# Altium PCB RollingBall.PcbDoc
Units mil, origin at the board's own origin, x right, y up, seen from the top; angles counter-clockwise.
Board outline 3645.67 x 3645.67 mil, 2 copper layers (Top Layer, Bottom Layer); 91 components, 88 nets, 285 pads, 51 vias.
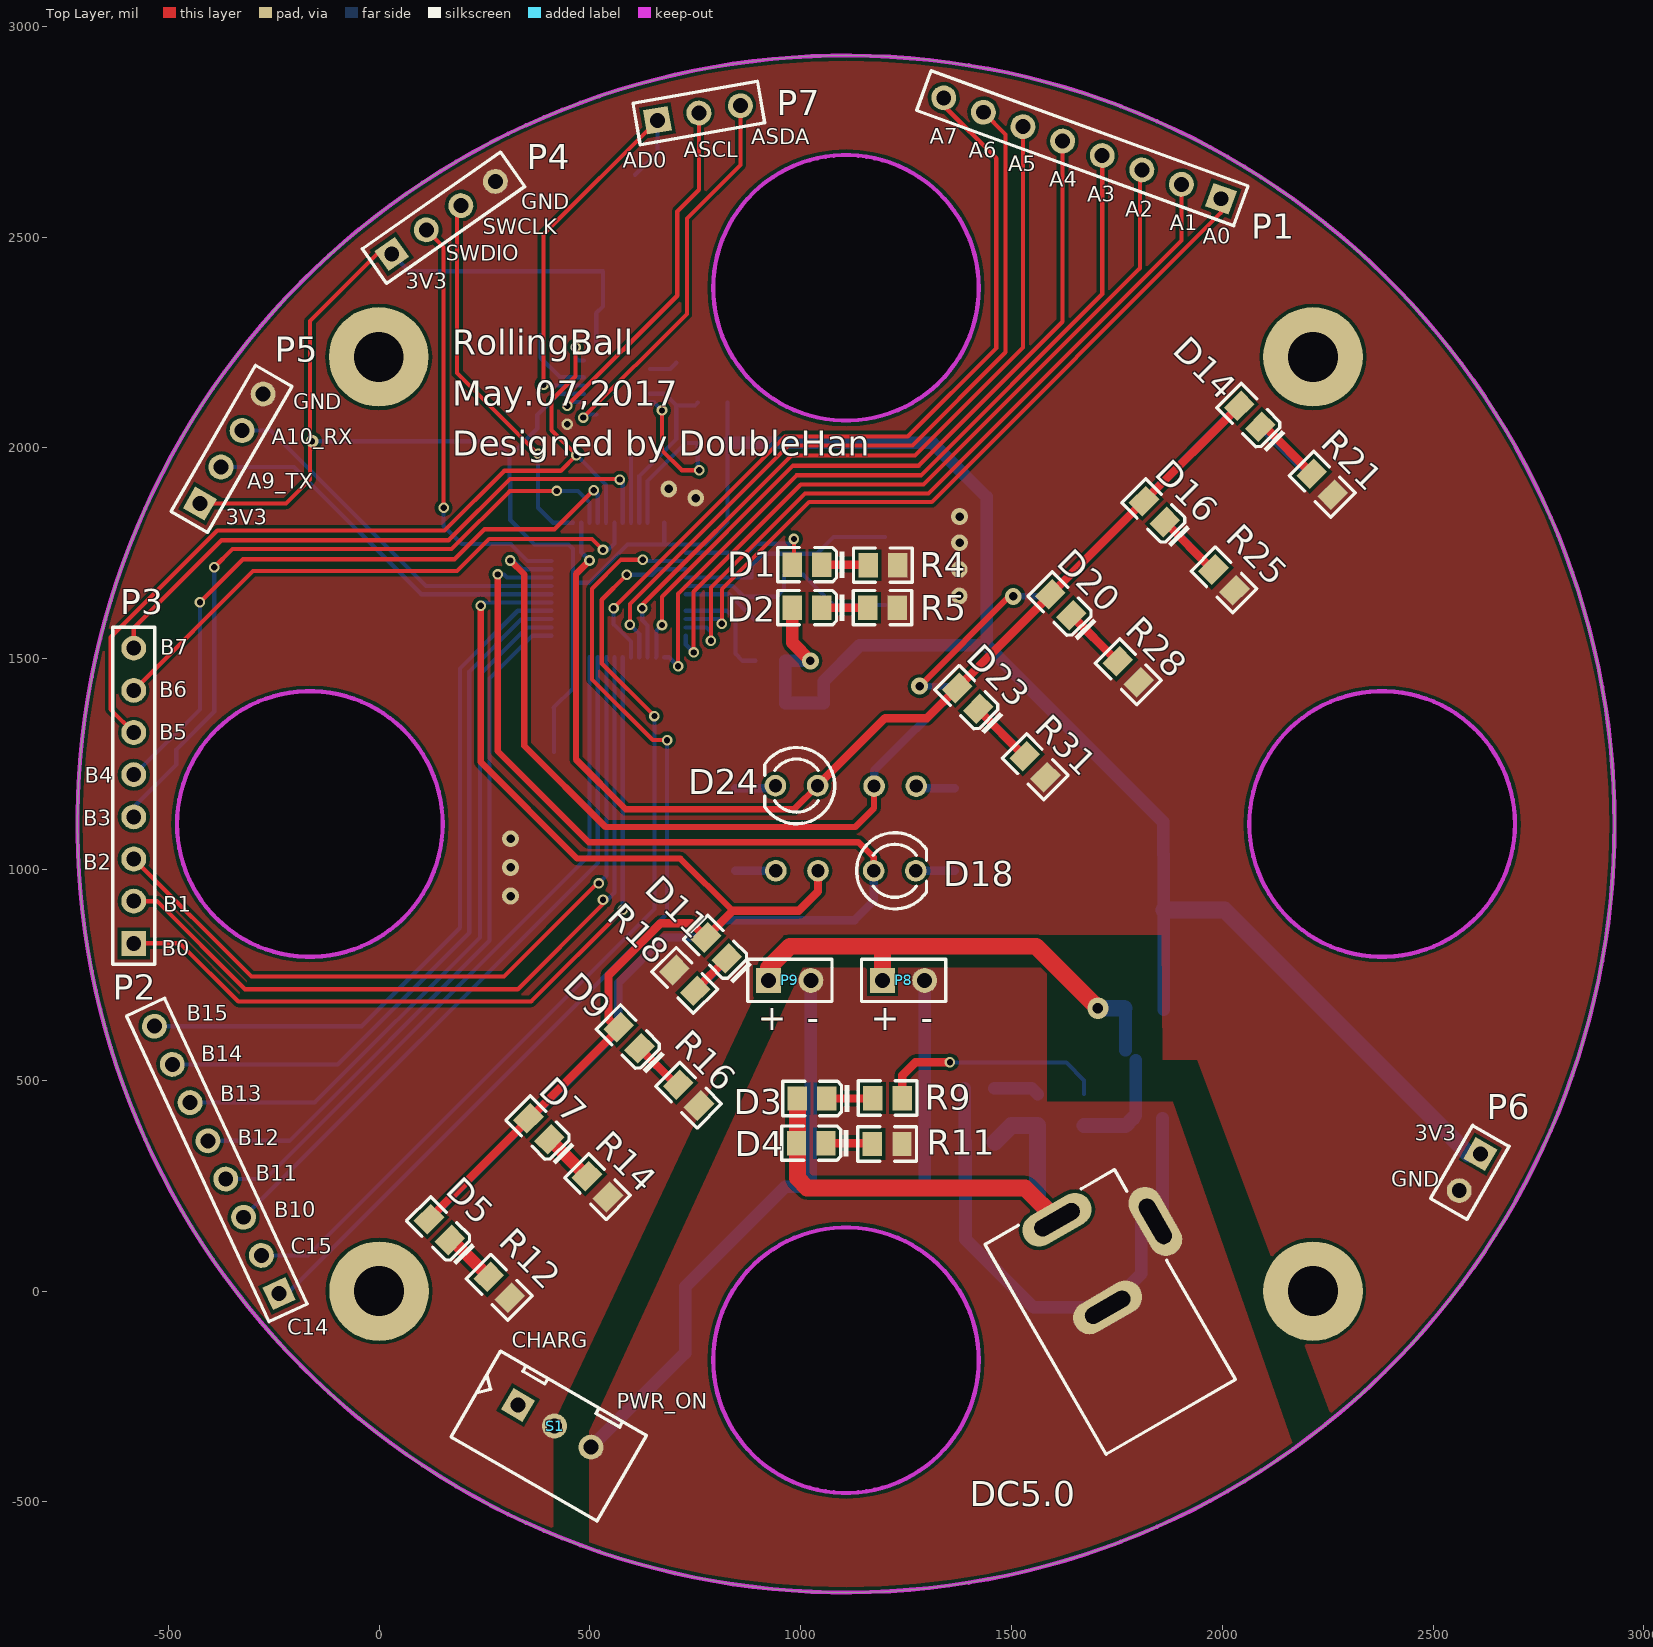
[diagram p0: Top Layer view]
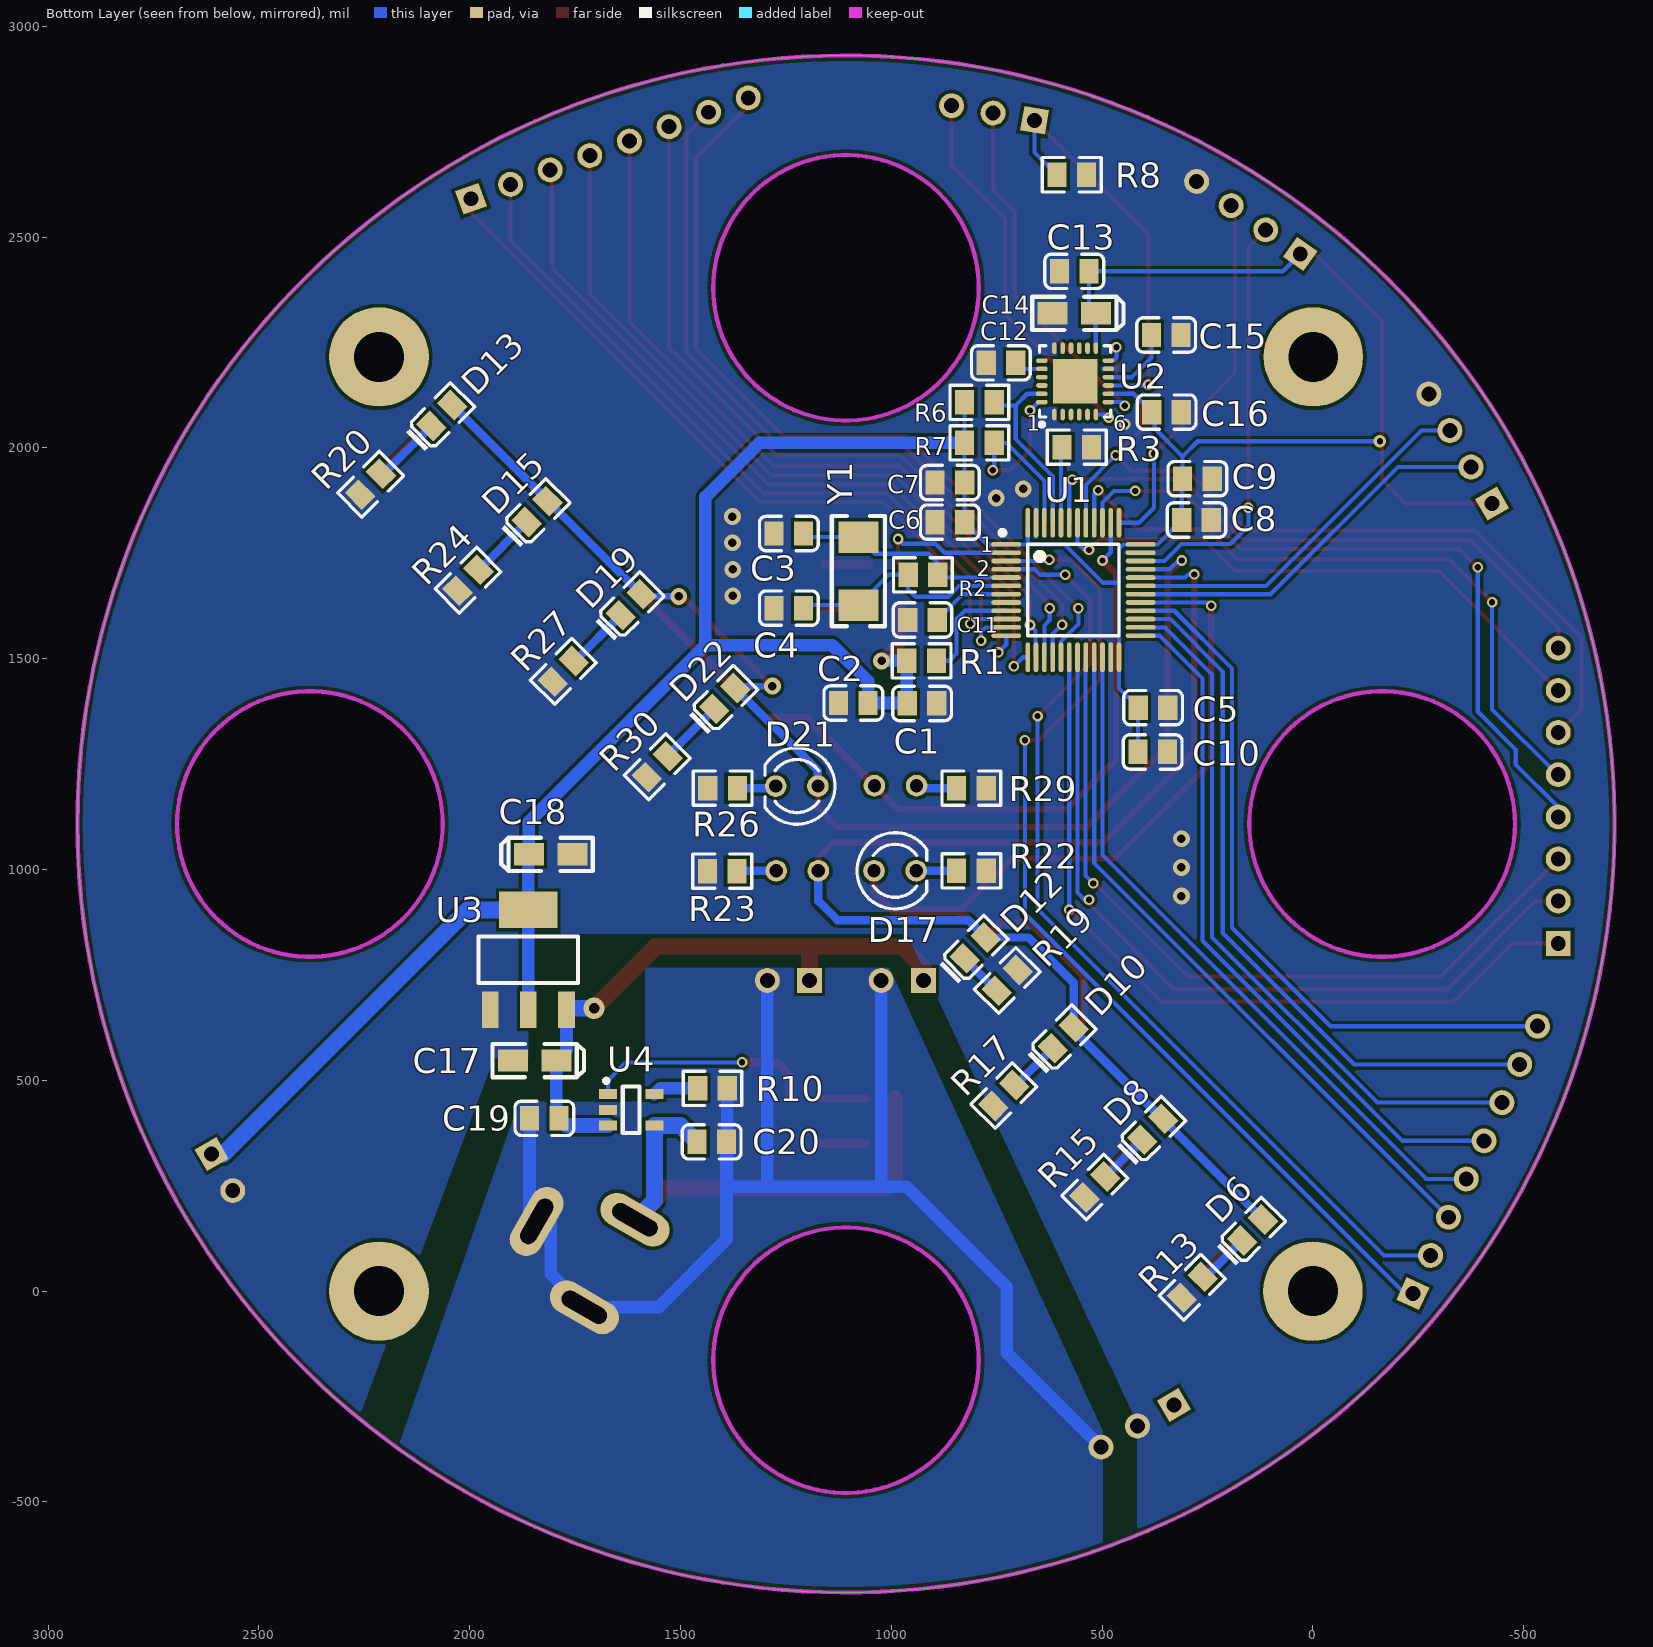
[diagram p1: Bottom Layer view, seen from below]
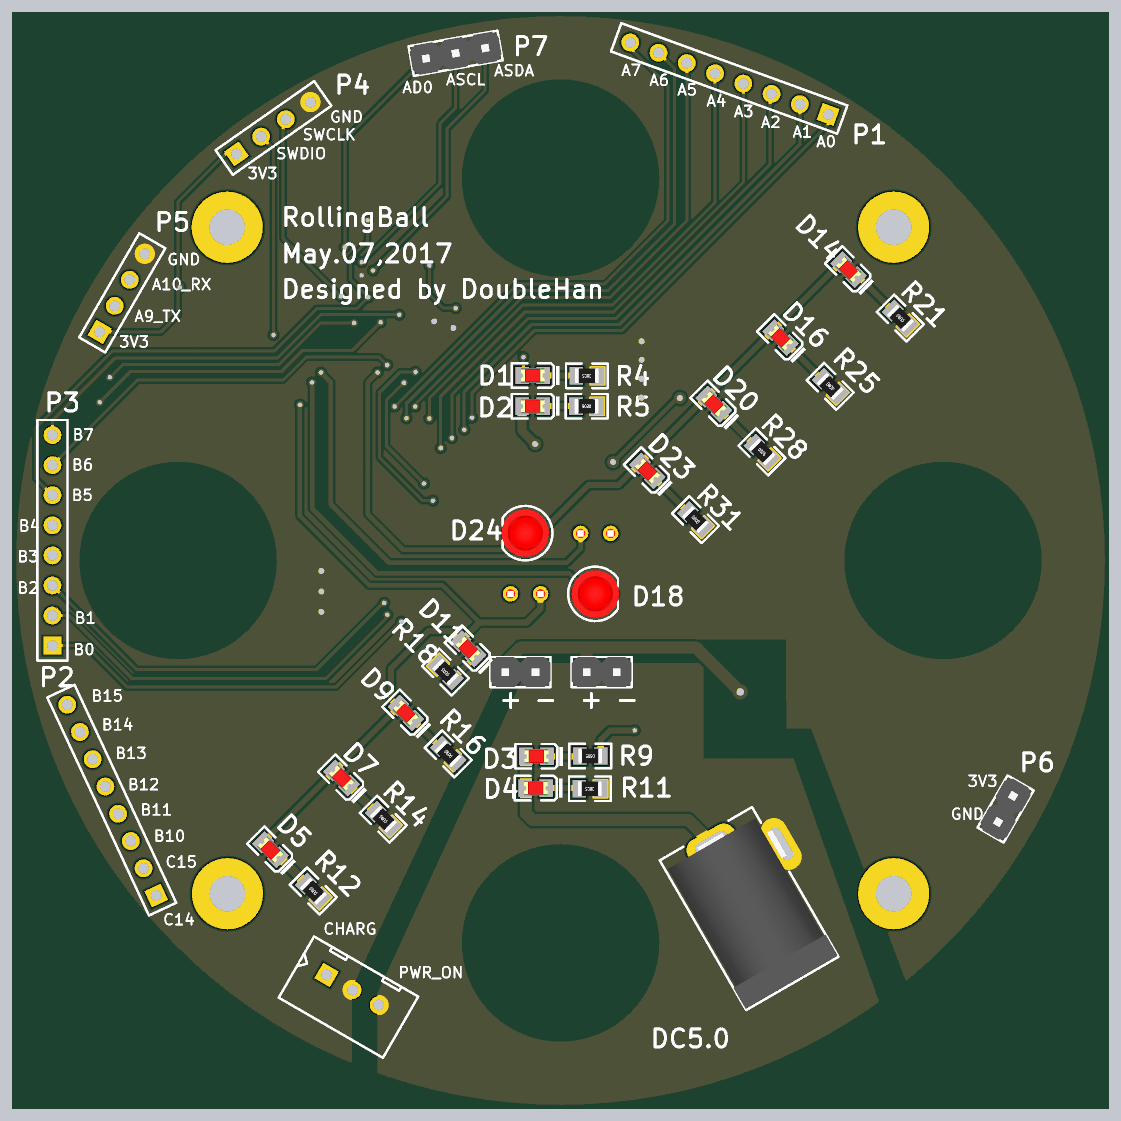
[diagram p2: 3D render of the assembled board from above, using the file's embedded part models]
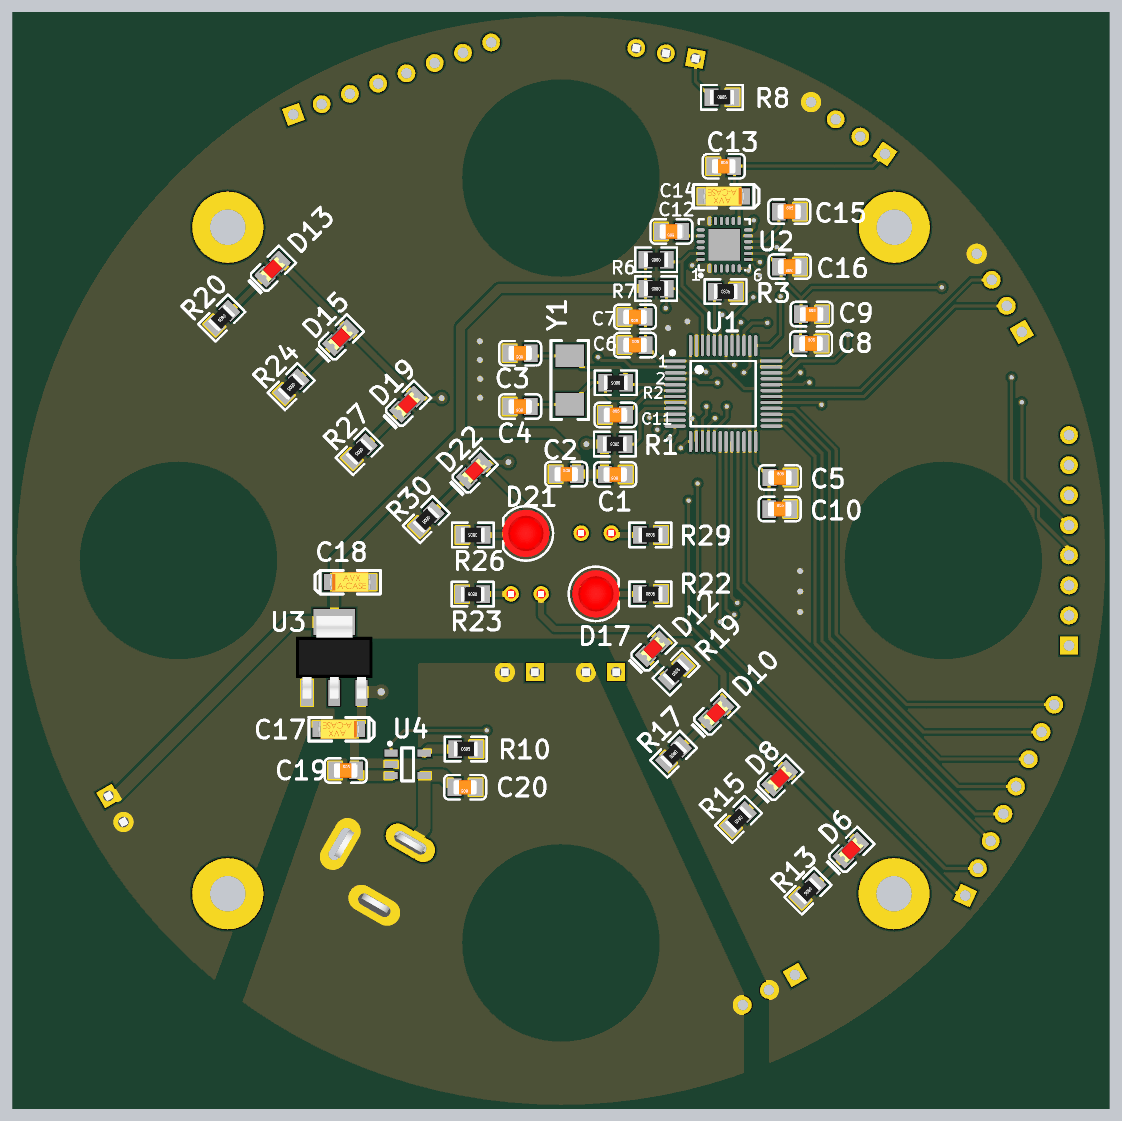
[diagram p3: 3D render of the assembled board from below, using the file's embedded part models]

## Layer stack, top to bottom
Top Solder: solder mask 0.4, Solder Resist, Dk 3.5
Top Layer: signal copper 1.4
Dielectric 1: dielectric 12.6, FR-4, Dk 4.8
Bottom Layer: signal copper 1.4
Bottom Solder: solder mask 0.4, Solder Resist, Dk 3.5

## Board outline
-715.44,1108.02 ccw(c1107.4,1108.02) 1107.4,-714.81 ccw(c1107.4,1108.02) 2930.23,1108.02 ccw(c1107.4,1108.02) 1107.4,2930.86 ccw(c1107.4,1108.02)
cut-out: -164.26,793.06 cw(c-164.26,1108.02) -479.22,1108.02 cw(c-164.26,1108.02) -164.26,1422.98 cw(c-164.26,1108.02) 150.7,1108.02 cw(c-164.26,1108.02)
cut-out: 1107.4,2064.72 cw(c1107.4,2379.68) 792.44,2379.68 cw(c1107.4,2379.68) 1107.4,2694.64 cw(c1107.4,2379.68) 1422.36,2379.68 cw(c1107.4,2379.68)
cut-out: 792.44,-163.63 ccw(c1107.4,-163.63) 1107.4,-478.59 ccw(c1107.4,-163.63) 1422.36,-163.63 ccw(c1107.4,-163.63) 1107.4,151.33 ccw(c1107.4,-163.63)
cut-out: 2064.09,1108.02 ccw(c2379.05,1108.02) 2379.05,793.06 ccw(c2379.05,1108.02) 2694.01,1108.02 ccw(c2379.05,1108.02) 2379.05,1422.98 ccw(c2379.05,1108.02)

## Design rules (kind name [scope] priority, off if disabled: settings)
Clearance [All] p1: gap=8
HoleSize [All] p1: absolutevalues=TRUE maxlimit=200 minlimit=1 maxpercent=80.000 minpercent=20.000
PolygonConnect [All] p1: connectstyle=Direct reliefconductorwidth=10 reliefentries=4 polygonreliefangle="90 Angle" airgapwidth=10
RoutingVias [All] p1: holewidth=11.81 width=19.68 viastyle="Through Hole" minholewidth=11.81 minwidth=19.68 maxholewidth=28 maxwidth=50
SolderMaskExpansion [All] p1: expansion=4
Width [All] p1: maxlimit=100 minlimit=6 preferedwidth=10 minimp=50.000000 maximp=50.000000 favimp=50.000000
29 further rules are at their usual default settings.

## Classes and differential pairs
component class LED: D5 D6 D7 D8 D9 D10 D11 D12 D13 D14 D15 D16 D17 D18 D19 D20 D21 D22 D23 D24 R12 R13 R14 R15 R16 R17 R18 R19 R20 R21 R22 R23 R24 R25 R26 R27 R28 R29 R30 R31
component class power: C17 C18 C19 C20 D3 D4 DC5.0 P8 P9 R9 R10 R11 S1 U3 U4
component class maincont: C1 C2 C3 C4 C5 C6 C7 C8 C9 C10 C11 D1 D2 P1 P2 P3 P4 P5 R1 R2 R3 R4 R5 U1 Y1
component class imu: C12 C13 C14 C15 C16 P6 P7 R6 R7 R8 U2

## Components (designator, comment, footprint, x,y, rotation, side; value= is the part's Value field where it differs from the comment)
C1 "10nF (103) 10% 50V" LC-0805_C 927,1394 r0 bottom
C2 "1uF (105) 10% 50V" LC-0805_C 1090,1395 r180 bottom
C3 "20pF (200) 5% 50V" LC-0805_C 1243,1797 r0 bottom
C4 "20pF (200) 5% 50V" LC-0805_C 1243,1620 r0 bottom
C5 "100nF(104) 10% 50V" LC-0805_C 379,1384 r180 bottom
C6 "4.7uF (475) 10% 25V" LC-0805_C 861,1824 r180 bottom
C7 "100nF(104) 10% 50V" LC-0805_C 861,1918 r0 bottom
C8 "100nF(104) 10% 50V" LC-0805_C 276,1829 r180 bottom
C9 "100nF(104) 10% 50V" LC-0805_C 274,1927 r180 bottom
C10 "100nF(104) 10% 50V" LC-0805_C 380,1279 r180 bottom
C11 "100nF(104) 10% 50V" LC-0805_C 926,1592 r180 bottom
C12 "2.2nF (222) 5% 50V" LC-0805_C 740,2202 r0 bottom
C13 "100nF(104) 10% 50V" LC-0805_C 566,2419 r180 bottom
C14 "10uF (106) ±10% 16V" LC-CASE-A_3216 566,2319 r180 bottom
C15 "100nF(104) 10% 50V" LC-0805_C 348,2268 r180 bottom
C16 "10nF (103) 10% 50V" LC-0805_C 347,2085 r0 bottom
C17 "10uF (106) ±10% 16V" LC-CASE-A_3216 1846,547 r180 bottom
C18 "10uF (106) ±10% 16V" LC-CASE-A_3216 1808,1036 r0 bottom
C19 "10uF (106) 10% 25V" LC-0805_C 1823,410 r180 bottom
C20 "1uF (105) 10% 50V" LC-0805_C 1426,354 r0 bottom
D1 "翠绿 0805" LC-0805_LED_S1 1015,1723 r180 top
D2 "红灯 0805" LC-0805_LED_S1 1015,1621 r180 top
D3 "翠绿 0805" LC-0805_LED_S1 1027,457 r180 top
D4 "红灯 0805" LC-0805_LED_S1 1025,351 r180 top
D5 "翠绿 0805" LC-0805_LED_S1 143,146 r135 top
D6 "翠绿 0805" LC-0805_LED_S1 143,145 r135 bottom
D7 "翠绿 0805" LC-0805_LED_S1 379,385 r135 top
D8 "翠绿 0805" LC-0805_LED_S1 380,384 r135 bottom
D9 "翠绿 0805" LC-0805_LED_S1 593,601 r135 top
D10 "翠绿 0805" LC-0805_LED_S1 592,601 r135 bottom
D11 "翠绿 0805" LC-0805_LED_S1 800,814 r135 top
D12 "翠绿 0805" LC-0805_LED_S1 801,814 r135 bottom
D13 "翠绿 0805" LC-0805_LED_S1 2066,2077 r135 bottom
D14 "翠绿 0805" LC-0805_LED_S1 2065,2075 r135 top
D15 "翠绿 0805" LC-0805_LED_S1 1840,1849 r135 bottom
D16 "翠绿 0805" LC-0805_LED_S1 1839,1849 r135 top
D17 "LED0" LED_A2 991,997 r0 bottom
D18 "LED0" LED_A2 1223,997 r180 top
D19 "翠绿 0805" LC-0805_LED_S1 1617,1628 r135 bottom
D20 "翠绿 0805" LC-0805_LED_S1 1617,1628 r135 top
D21 "LED0" LED_A2 1224,1198 r180 bottom
D22 "翠绿 0805" LC-0805_LED_S1 1395,1406 r135 bottom
D23 "翠绿 0805" LC-0805_LED_S1 1396,1406 r135 top
D24 "LED0" LED_A2 990,1199 r0 top
DC5.0 "PWRCON" DC-005 1588,204 r120 top (schematic designator J1)
P1 "PA_L" HDR1X8 1997,2591 r160 top
P2 "PB_H" HDR1X8 -237,-6 r115 top
P3 "PB_L" HDR1X8 -582,825 r90 top
P4 "SWD" HDR4X1-2.54 30,2460 r35 top
P5 "UART" HDR4X1-2.54 -425,1868 r60 top
P6 "PWR" HDR2X1-2.54 2612,325 r240 top
P7 "AUX" HDR3X1-2.54 660,2777 r10 top
P8 "BAT1" HDR2X1-2.54 1194,737 r0 top
P9 "BAT2" HDR2X1-2.54 924,737 r0 top
R1 "0Ω (0R0) ±1%" LC-0805_R 928,1495 r0 bottom
R2 "NC" LC-0805_R 925,1699 r0 bottom
R3 "1KΩ (1001) ±1%" LC-0805_R 560,2002 r180 bottom
R4 "1KΩ (1001) ±1%" LC-0805_R 1195,1722 r180 top
R5 "1KΩ (1001) ±1%" LC-0805_R 1194,1621 r180 top
R6 "4.7KΩ (4701) ±1%" LC-0805_R 791,2108 r0 bottom
R7 "4.7KΩ (4701) ±1%" LC-0805_R 791,2012 r0 bottom
R8 "1KΩ (1001) ±1%" LC-0805_R 572,2648 r180 bottom
R9 "1KΩ (1001) ±1%" LC-0805_R 1206,458 r180 top
R10 "1.5KΩ (1501) ±1%" LC-0805_R 1424,481 r180 bottom
R11 "1KΩ (1001) ±1%" LC-0805_R 1205,349 r180 top
R12 "200Ω (2000) ±1%" LC-0805_R 285,9 r315 top
R13 "200Ω (2000) ±1%" LC-0805_R 286,9 r315 bottom
R14 "200Ω (2000) ±1%" LC-0805_R 518,248 r315 top
R15 "200Ω (2000) ±1%" LC-0805_R 517,247 r315 bottom
R16 "200Ω (2000) ±1%" LC-0805_R 734,465 r315 top
R17 "200Ω (2000) ±1%" LC-0805_R 733,464 r315 bottom
R18 "200Ω (2000) ±1%" LC-0805_R 725,737 r135 top
R19 "200Ω (2000) ±1%" LC-0805_R 725,737 r135 bottom
R20 "200Ω (2000) ±1%" LC-0805_R 2235,1914 r315 bottom
R21 "200Ω (2000) ±1%" LC-0805_R 2237,1914 r315 top
R22 "200Ω (2000) ±1%" LC-0805_R 810,997 r180 bottom
R23 "200Ω (2000) ±1%" LC-0805_R 1401,996 r0 bottom
R24 "200Ω (2000) ±1%" LC-0805_R 2004,1686 r315 bottom
R25 "200Ω (2000) ±1%" LC-0805_R 2004,1687 r315 top
R26 "200Ω (2000) ±1%" LC-0805_R 1400,1193 r0 bottom
R27 "200Ω (2000) ±1%" LC-0805_R 1778,1470 r315 bottom
R28 "200Ω (2000) ±1%" LC-0805_R 1777,1469 r315 top
R29 "200Ω (2000) ±1%" LC-0805_R 810,1193 r180 bottom
R30 "200Ω (2000) ±1%" LC-0805_R 1555,1244 r315 bottom
R31 "200Ω (2000) ±1%" LC-0805_R 1556,1244 r315 top
S1 "SS-12D00(1P2T)" XH2.54-3P 416,-320 r330 top
U1 "STM32F103C8T6" LC-LQFP-48_7x7x05P 568,1663 r270 bottom
U2 "MPU-6050" LC-QFN-24_4x4x05P 564,2158 r180 bottom
U3 "AMS1117-3.3" LC-SOT-223 1861,786 r270 bottom
U4 "TP4054" LC-SOT-23-5 1617,430 r0 bottom
Y1 "8MHz ±20ppm 20pF" LC-SMD-5032_2P 1078,1708 r270 bottom

## Footprints (in the part's own frame and the unit in brackets; to place one, negate y for a bottom-side part, rotate by r counter-clockwise, add the part's x,y. Pads: shape width x height; smd on the part's side, far side on the other; paste and mask are expansions set on the pad)
DC-005 [mm] "DC电源插座"
  oval 2x4.5 hole 1 slot 3 at 90 deg: 1(-1.016,0) 2(-7.112,0)
  oval 4.5x2 hole 1 slot 3 at 0 deg: 3(-4.064,-5.08)
  silkscreen extent -14.73,-4.5 -0.13,4.5, body extent -14.59,-5.01 -0.76,4.5, height 11.02
HDR1X8 [mm] "Connector; Header; 8 Position"
  rect 1.5x1.5 hole 0.9: 1(0,0)
  round 1.5 hole 0.9: 2(2.54,0) 3(5.08,0) 4(7.62,0) 5(10.16,0) 6(12.7,0) 7(15.24,0) 8(17.78,0)
  silkscreen extent -1.27,-1.27 19.05,1.27
HDR2X1-2.54 [mm] "2.54单排针排座"
  rect 1.5x1.5 hole 0.9: 1(0,0)
  round 1.5 hole 0.9: 2(2.54,0)
  silkscreen extent -1.27,-1.27 3.81,1.27, body extent -1.27,-1.27 3.81,1.27, height 8.54
HDR3X1-2.54 [mm] "2.54单排针排座"
  rect 1.5x1.5 hole 0.9: 1(0,0)
  round 1.5 hole 0.9: 2(2.54,0) 3(5.08,0)
  silkscreen extent -1.27,-1.27 6.35,1.27, body extent -1.27,-1.27 6.35,1.27, height 8.54
HDR4X1-2.54 [mm] "2.54单排针排座"
  rect 1.5x1.5 hole 0.9: 1(0,0)
  round 1.5 hole 0.9: 2(2.54,0) 3(5.08,0) 4(7.62,0)
  silkscreen extent -1.27,-1.27 8.89,1.27
LC-0805_C [mm]
  rect 1.16x1.47 smd: 1(-0.89,0) 2(0.89,0)
  silkscreen extent -1.77,-1.04 1.77,1.04, body extent -1,-0.63 1,0.62, height 0.77
LC-0805_LED_S1 [mm]
  rect 1.16x1.47 smd: A(0.89,0) K(-0.89,0)
  silkscreen extent -2.25,-1.04 1.77,1.03, body extent -1.01,-0.62 1.01,0.62, height 1.1
LC-0805_R [mm]
  rect 1.16x1.47 smd: 1(-0.89,0) 2(0.89,0)
  silkscreen extent -1.77,-1.04 1.77,1.03, body extent -1,-0.63 1,0.62, height 0.49
LC-CASE-A_3216 [mm]
  rect 1.8x1.35 smd: 1(1.31,0) 2(-1.31,0)
  silkscreen extent -2.54,-1 2.97,1, body extent -1.7,-0.84 1.7,0.84, height 1.71
LC-LQFP-48_7x7x05P [mm]
  oval 0.28x1.8 smd mask+0.051: 1(-2.75,-4.05) 2(-2.25,-4.05) 3(-1.75,-4.05) 4(-1.25,-4.05) 5(-0.75,-4.05) 6(-0.25,-4.05) 7(0.25,-4.05) 8(0.75,-4.05) 9(1.25,-4.05) 10(1.75,-4.05) 11(2.25,-4.05) 12(2.75,-4.05) 25(2.75,4.05) 26(2.25,4.05) 27(1.75,4.05) 28(1.25,4.05) 29(0.75,4.05) 30(0.25,4.05) 31(-0.25,4.05) 32(-0.75,4.05) 33(-1.25,4.05) 34(-1.75,4.05) 35(-2.25,4.05) 36(-2.75,4.05)
  oval 1.8x0.28 smd mask+0.051: 13(4.05,-2.75) 14(4.05,-2.25) 15(4.05,-1.75) 16(4.05,-1.25) 17(4.05,-0.75) 18(4.05,-0.25) 19(4.05,0.25) 20(4.05,0.75) 21(4.05,1.25) 22(4.05,1.75) 23(4.05,2.25) 24(4.05,2.75) 37(-4.05,2.75) 38(-4.05,2.25) 39(-4.05,1.75) 40(-4.05,1.25) 41(-4.05,0.75) 42(-4.05,0.25) 43(-4.05,-0.25) 44(-4.05,-0.75) 45(-4.05,-1.25) 46(-4.05,-1.75) 47(-4.05,-2.25) 48(-4.05,-2.75)
  silkscreen extent -3.6,-4.43 2.75,2.75
LC-QFN-24_4x4x05P [mm]
  rect 2.68x2.68 smd mask+0.051: 0(0,0)
  oval 0.28x0.7 smd mask+0.051: 1(-1.25,-2) 2(-0.75,-2) 3(-0.25,-2) 4(0.25,-2) 5(0.75,-2) 6(1.25,-2) 13(1.25,2) 14(0.75,2) 15(0.25,2) 16(-0.25,2) 17(-0.75,2) 18(-1.25,2)
  oval 0.7x0.28 smd mask+0.051: 7(2,-1.25) 8(2,-0.75) 9(2,-0.25) 10(2,0.25) 11(2,0.75) 12(2,1.25) 19(-2,1.25) 20(-2,0.75) 21(-2,0.25) 22(-2,-0.25) 23(-2,-0.75) 24(-2,-1.25)
  silkscreen extent -2.15,-2.72 2.15,2.15
LC-SMD-5032_2P [mm]
  rect 1.9x2.4 smd: 1(-2.05,0) 2(2.05,0)
  silkscreen extent -3.32,-1.6 3.32,1.6
LC-SOT-23-5 [mm]
  rect 1.1x0.6 smd: 1(1.4,-0.95) 2(1.4,0) 3(1.4,0.95) 4(-1.4,0.95) 5(-1.4,-0.95)
  silkscreen extent -0.5,-1.87 1.63,1.4
LC-SOT-223 [mm]
  rect 2.2x1 smd: 1(3,-2.3) 2(3,0) 3(3,2.3)
  rect 2.2x3.5 smd: 2(-3,0)
  silkscreen extent -1.4,-3 1.4,3, body extent -3.49,-3.24 3.49,3.24, height 1.64
LED_A2 [mm] "直径3MM LED"
  round 1.3 hole 0.8: 1(1.27,0) 2(-1.27,0)
  silkscreen extent -1.91,-2.3 2.3,2.3, body extent -2,-2 2,2, height 4.5
XH2.54-3P [mm] "XH2.54端子直针"
  rect 1.5x1.5 hole 0.9: 1(-2.54,0)
  round 1.5 hole 0.9: 2(0,0) 3(2.54,0)
  silkscreen extent -5.08,-3.68 5.08,2.29, body extent -5.08,-3.68 5.08,2.29, height 1.5

## Part data
C1 C16: library part "0805 10nF (103) 10% 50V", "贴片电容"
C2 C20: library part "0805 1uF (105) 10% 50V", "贴片电容"
C3 C4: library part "0805 20pF (200) 5% 50V", "贴片电容"
C5 C7 C8 C9 C10 C11 C13 C15: library part "0805 100nF(104) 10% 50V", "贴片电容"
C6: library part "0805 4.7uF (475) 10% 25V", "贴片电容"
C12: library part "0805 2.2nF (222) 5% 50V", "贴片电容"
C14 C17 C18: library part "3216 10uF (106) 10% 16V", "钽电容"
C19: library part "0805 10uF (106) 10% 25V", "贴片电容"
D1 D3 D5 D6 D7 D8 D9 D10 D11 D12 D13 D14 D15 D16 D19 D20 D22 D23: library part "0805 翠绿", "发光二极管"
D2 D4: library part "0805 红灯", "发光二极管"
D17 D18 D21 D24: "发光二极管"
DC5.0: "直流电源端子"
P1 P2 P3: library part "Header 8", "Header, 8-Pin"
P4 P5: library part "Header 4", "接插件"
P6 P8 P9: library part "Header 2", "接插件"
P7: library part "Header 3", "接插件"
R1: library part "0805 0Ω (0R0) 1%", "贴片电阻"
R2: library part "0805 1MΩ (1004) 1%", "贴片电阻"
R3 R4 R5 R8 R9 R11: library part "0805 1KΩ (1001) 1%", "贴片电阻"
R6 R7: library part "0805 4.7KΩ (4701) 1%", "贴片电阻"
R10: library part "0805 1.5KΩ (1501) 1%", "贴片电阻"
R12 R13 R14 R15 R16 R17 R18 R19 R20 R21 R22 R23 R24 R25 R26 R27 R28 R29 R30 R31: library part "0805 200Ω (2000) 1%", "贴片电阻"
S1: library part SW-SPDT, "开关"
U1: "ARM"
U2: "传感器"
U3: library part "SOT-223 AMS1117-3.3", "低压差线性稳压(LDO)"
U4: "电池电源管理"
Y1: library part "SMD-5032_2P 8MHz 20ppm 20pF", "贴片晶振"

## Free pads (board coordinates)
  round 236.22 hole 118.11: 0(2215,2216) 1(-1,2216) 2(0,0) 3(2215,0)

## Via types
v1: diameter 25, hole 15, Top Layer to Bottom Layer, tented both sides, 36 vias
v2: diameter 40, hole 20, Top Layer to Bottom Layer, tented both sides, 12 vias
v3: diameter 27, hole 15, Top Layer to Bottom Layer, tented both sides, 1 vias
v4: diameter 50, hole 25, Top Layer to Bottom Layer, tented both sides, 1 vias
v5: diameter 30, hole 15, Top Layer to Bottom Layer, tented both sides, 1 vias

## Nets (pads, with @x,y where several pads share a name; then routed paths per layer and width w, separated by ;. In a path a pad name is that pad's centre, name@x,y a point inside that pad or via, vN(x,y) a via of type N, cw(c..) or ccw(c..) an arc to the next point about the centre after c; other vN are vias at no path point)
AD0: P7.1 R8.1 U2.9 | length 985.8
  Top Layer w10: v1(390,2150) 390,2507 P7.1
  Bottom Layer w10: v1(390,2150) 391.84,2148.16 U2.9 ; R8.1 660,2700.96 P7.1
ASCL: P7.2 U2.7 | length 866.7
  Top Layer w10: v1(446,2100) 707,2361 707,2561 758.48,2612.48 P7.2
  Bottom Layer w10: v1(446,2100) 454.79,2108.79 U2.7
ASDA: P7.3 U2.6 | length 928
  Top Layer w10: v1(484,2072) 730,2318 730,2544 856.96,2670.96 P7.3
  Bottom Layer w10: v1(484,2072) 491.26,2079.26 U2.6
GND: C1.1 C2.1 C3.2 C4.2 C5.2 C6.1 C7.2 C8.2 C9.2 C10.2 C11.1 C12.2 C13.1 C14.2 C15.2 C16.1 C17.2 C18.2 P4.4 P5.4 P6.2 R3.2 R4.1 R5.1 R8.2 R12.2 R13.2 R14.2 R15.2 R16.2 R17.2 R18.2 R19.2 R20.2 R21.2 R22.2 R23.2 R24.2 R25.2 R26.2 R27.2 R28.2 R29.2 R30.2 R31.2 S1.2 U1.8 U1.23 U1.35 U1.47 U2.1 U2.11 U2.18 U3.1
  other v2: 312,937 312,1005 312,1073 1376,1649 1376,1712 1377,1775 1377,1837 751,1881 687,1903
  other v3: 446,2056
GND_BAT: C19.1 C20.1 DC5.0.2 DC5.0.3 P8.2 P9.2 R10.2 R11.1 S1.3 U4.2 | length 3533.6
  Bottom Layer w30: S1.3 725.8,-146.8 725.8,9.8 964,248 1388.96,248 R10.2 ; 1024,251 P9.2 ; 1294,256 P8.2 ; C20.1 1390.96,123.04 1552.49,-38.49 DC5.0.2 1807.56,41.08 DC5.0.3@1807.56,165.44 ; DC5.0.3@1858.04,182.27 C19.1
INT: P3.6 U1.41 U2.12 | length 2073.6
  Top Layer w10: P3.6 -637,1380 -637,1550.52 -635.91,1551.61 -635.91,1552.09 -384,1804 155,1804 297,1946 431,1946 v1(468,1983) 409,2042 409,2113 466,2170 v1(466,2239)
  Bottom Layer w10: v1(466,2239) 466,2214 472.79,2207.21 U2.12 ; v1(468,1983) 538.47,1912.53 U1.41
LED_CONT1: D5.A D7.A D9.A D11.A D17.1 U1.29 | length 2716.7
  Top Layer w15: v1(241,1626) 241,1255 470,1026 714.45,1026 838.45,902
  Top Layer w20: D5.A 568.22,620.78 544,645 544,749 668,873 741,873 D11.A 838.45,902 995,902 1041,948 D17.1
  Bottom Layer w10: v1(241,1626) 248.47,1633.47 U1.29
LED_CONT2: D6.A D8.A D10.A D12.A D18.1 U1.32 | length 3083.5
  Top Layer w15: v1(281,1700) 281,1281 497,1065 1137,1065 1173,1029 D18.1
  Bottom Layer w10: v1(281,1700) 296,1700 303.47,1692.53 U1.32
  Bottom Layer w20: D6.A 567.22,618.78 D10.A 567.22,731.22 674.78,838.78 D12.A 817.45,880 1128,880 1173,925 D18.1
LED_CONT3: D13.A D15.A D19.A D21.1 D22.A U1.33 | length 2977.2
  Top Layer w15: v1@307,1733 v1(311,1733) 344,1700 344,1294 537,1101 1129,1101 1174,1146 D21.1 ; v2(1282,1435) v2@1495,1648
  Bottom Layer w10: v1(311,1733) 315,1737 339.79,1712.21 U1.33
  Bottom Layer w15: v2(1282,1435) 1366,1435 D22.A ; v2(1504,1648) 1587.45,1648 D19.A
  Bottom Layer w20: D21.1 1174,1234.55 D22.A ; D19.A D13.A
LED_CONT4: D14.A D16.A D20.A D23.A D24.1 U1.38 | length 2601.2
  Top Layer w15: v1(499,1733) 467,1701 467,1261 585,1143 984,1143 D24.1
  Top Layer w20: D24.1 1200,1359 1299.45,1359 D23.A D16.A D14.A
  Bottom Layer w10: U1.38 479.42,1752.58 v1(499,1733)
NetC3_1: C3.1 R2.1 U1.5 Y1.1 | length 528.4
  Bottom Layer w10: U1.5 883.49,1692.53 883.49,1720.49 912,1749 1038.29,1749 Y1.1 C3.1@1199.67,1788.71
NetC4_1: C4.1 R2.2 U1.6 Y1.2 | length 555.1
  Bottom Layer w10: U1.6 839.16,1672.84 865,1647 942,1647 960.04,1665.04 R2.2 1006.29,1699 Y1.2 C4.1@1200.67,1627.29
NetC11_2: C11.2 U1.7 | length 188.8
  Bottom Layer w10: U1.7 829.8,1653.16 C11.2
NetC12_1: C12.1 U2.20 | length 68.2
  Bottom Layer w10: U2.20 690.49,2187.53 C12.1
NetC15_1: C15.1 U2.10 | length 175.4
  Bottom Layer w10: C15.1 383.04,2213.96 429.16,2167.84 U2.10
NetD1_K: D1.K R4.2 | length 108.9
  Top Layer w20: D1.K R4.2@1158.96,1723
NetD2_K: D2.K R5.2 | length 108.9
  Top Layer w20: D2.K R5.2
NetD3_K: D3.K R9.2 | length 107.9
  Top Layer w20: D3.K R9.2@1169.96,457
NetD4_K: D4.K R11.2 | length 107.9
  Top Layer w20: D4.K R11.2@1167.96,351
NetD5_K: D5.K R12.1 | length 128.7
  Top Layer w30: D5.K 172.78,121.22 R12.1
NetD6_K: D6.K R13.1 | length 129.3
  Bottom Layer w20: D6.K 254.22,33.78 R13.1
NetD7_K: D7.K R14.1 | length 127.7
  Top Layer w30: D7.K@405.78,360.22 D7.K 491.22,272.78 R14.1
NetD8_K: D8.K R15.1 | length 123.7
  Bottom Layer w20: D8.K R15.1
NetD9_K: D9.K R16.1 | length 122.3
  Top Layer w20: D9.K R16.1@704.22,489.78
NetD10_K: D10.K R17.1 | length 131.7
  Bottom Layer w20: D10.K@620.78,576.22 D10.K 704.22,488.78 R17.1
NetD11_K: D11.K R18.1 | length 106.1
  Top Layer w20: R18.1@749.78,714.22 D11.K
NetD12_K: D12.K R19.1 | length 108.5
  Bottom Layer w20: R19.1 825.78,788.22 D12.K
NetD13_K: D13.K R20.1 | length 160.4
  Bottom Layer w20: D13.K R20.1@2204.22,1938.78
NetD14_K: D14.K R21.1 | length 168.6
  Top Layer w20: D14.K 2100.78,2050.22 R21.1
NetD15_K: D15.K R24.1 | length 160.4
  Bottom Layer w20: D15.K R24.1@1978.22,1710.78
NetD16_K: D16.K R25.1 | length 162
  Top Layer w20: D16.K 1976.22,1711.78 R25.1
NetD17_2: D17.2 R22.1 | length 96
  Bottom Layer w20: R22.1 D17.2
NetD18_2: D18.2 R23.1 | length 92
  Bottom Layer w20: D18.2 R23.1@1364.96,997
NetD19_K: D19.K R27.1 | length 153.4
  Bottom Layer w20: D19.K R27.1@1750.22,1494.78
NetD20_K: D20.K R28.1 | length 155.8
  Top Layer w20: D20.K 1751.22,1493.78 R28.1
NetD21_2: D21.2 R26.1 | length 93
  Bottom Layer w20: D21.2 1279,1193 R26.1
NetD22_K: D22.K R30.1 | length 160.2
  Bottom Layer w20: D22.K@1419.78,1379.22 D22.K 1530.22,1270.78 R30.1
NetD23_K: D23.K R31.1 | length 158.2
  Top Layer w20: D23.K 1420.78,1379.22 R31.1
NetD24_2: D24.2 R29.1 | length 89
  Bottom Layer w20: R29.1 D24.2@934,1193
NetR1_1: R1.1 U1.9 | length 262.9
  Bottom Layer w10: U1.9 825.45,1613.79 845,1594.23 845,1512 862,1495 R1.1
NetR3_1: R3.1 U1.44 | length 177.1
  Bottom Layer w10: U1.44 R3.1@597.53,1999.51
NetR9_1: R9.1 U4.1 | length 547.9
  Top Layer w20: R9.1 1241.04,512.04 1272,543 v1(1354,543)
  Bottom Layer w10: v1@1354,542 1630,542 1672.12,499.88 U4.1
NetR10_1: R10.1 U4.5 | length 108.5
  Bottom Layer w30: R10.1 1548.28,481 U4.5
NetS1_1: S1.1
NetU2_2: U2.2
NetU2_3: U2.3
NetU2_4: U2.4
NetU2_5: U2.5
NetU2_14: U2.14
NetU2_15: U2.15
NetU2_16: U2.16
NetU2_17: U2.17
NetU2_19: U2.19
NetU2_21: U2.21
NetU2_22: U2.22
PA0: P1.1 U1.10 | length 1764.9
  Top Layer w10: v1(813,1583) 813,1665 1020,1872 1311,1872 1997,2558 P1.1
  Bottom Layer w10: U1.10 811.9,1594.1 813,1593 v1(813,1583)
PA1: P1.2 U1.11 | length 1801
  Top Layer w10: v1(787,1543) 787,1669 1010,1892 1303,1892 1903.03,2492.03 P1.2
  Bottom Layer w10: U1.11 776.58,1574.42 787,1564 v1(787,1543)
PA2: P1.3 U1.12 | length 1805.3
  Top Layer w10: v1(746,1515) 746,1659 1000,1913 1291,1913 1804.4,2426.4 1804.4,2659.4 P1.3
  Bottom Layer w10: U1.12 727.45,1533.55 v1(746,1515)
PA3: P1.4 U1.13 | length 1842.8
  Top Layer w10: v1(709,1482) 709,1654 990,1935 1285,1935 1715.09,2365.09 P1.4
  Bottom Layer w10: U1.13 687.45,1503.55 v1(709,1482)
PA4: P1.5 U1.14 | length 1798.3
  Top Layer w10: v1(671,1580) 671,1647 982,1958 1279.88,1958 1621.12,2299.24 P1.5
  Bottom Layer w10: U1.14 657.76,1504.72 657.76,1566.76 v1(671,1580)
PA5: P1.6 U1.15 | length 1809.5
  Top Layer w10: v1(624,1620) 624,1628 978,1982 1271,1982 1527.15,2238.15 P1.6
  Bottom Layer w10: v1(624,1620) 624,1592 636.9,1579.1 U1.15
PA6: P1.7 U1.16 | length 1865
  Top Layer w10: v1(595,1581) 595,1630 971,2006 1265,2006 1486,2227 1486,2743.4 P1.7
  Bottom Layer w10: v1(595,1581) 617.21,1558.79 U1.16
PA7: P1.8 U1.17 | length 1942.3
  Top Layer w10: v1(556,1620) 963,2027 1254,2027 1464,2237 1464,2687 1339.22,2811.78 P1.8
  Bottom Layer w10: v1(556,1620) 556,1582 597.53,1540.47 U1.17
PA9_TX: P5.2 U1.30 | length 908.4
  Bottom Layer w10: P5.2 -201.6,1954.6 99.84,1653.16 U1.30
PA10_RX: P5.3 U1.31 | length 886.1
  Bottom Layer w10: P5.3 -257.21,2041.21 111.16,1672.84 U1.31
PA13_SWDIO: P4.2 U1.34 | length 1009.3
  Top Layer w10: P4.2 153,2476.27 v1(153,1858)
  Bottom Layer w10: v1(153,1858) 153,1815 196,1772 312,1772 352.1,1731.9 U1.34
PA14_SWCLK: P4.3 U1.37 | length 897.4
  Top Layer w10: P4.3 185,2565.88 185,2178 v1(377,1986)
  Bottom Layer w10: v1(377,1986) 377,1858 412.55,1822.45 U1.37
PB0: P3.1 U1.18 | length 1906.3
  Top Layer w10: P3.1 -472,825 -334,687 360.68,687 v1(577.84,904.16)
  Bottom Layer w10: v1(577.84,904.16) U1.18
PB1: P3.2 U1.19 | length 1885.9
  Top Layer w10: P3.2 -527,925 -318,716 329,716 531,918 v1(531,928)
  Bottom Layer w10: v1(531,928) 541,928 558.16,945.16 U1.19
PB2: P3.3 U1.20 | length 1854.3
  Top Layer w10: P3.3 -303,746 295.94,746 516.94,967 v1(521,967)
  Bottom Layer w10: v1(521,967) 539.47,985.47 U1.20@539.47,1503.55
PB3: P3.4 U1.39 | length 1695.9
  Top Layer w10: v1(-391,1717) -348,1760 172,1760 310,1898 v1(421,1898)
  Bottom Layer w10: P3.4 -582,1148 -481,1249 -481,1285 -391,1375 v1(-391,1717) ; v1(421,1898) 472,1898 499.1,1870.9 U1.39
PB4: P3.5 U1.40 | length 1601
  Top Layer w10: v1(-425,1634) -323,1736 179,1736 250,1807 416,1807 v1(509,1900)
  Bottom Layer w10: P3.5 -580,1225 -425,1380 v1(-425,1634) ; v1(509,1900) 518.79,1890.21 U1.40
PB6: P3.7 U1.42 | length 1355.2
  Top Layer w10: P3.7 -299,1708 185,1708 261,1784 505,1784 v1(531,1758)
  Bottom Layer w10: v1(531,1758) 543,1758 558.16,1773.16 U1.42
PB7: P3.8 U1.43 | length 1453.4
  Top Layer w10: P3.8 -582,1573 -374,1781 165,1781 310.5,1926.5 569.5,1926.5 v1(571,1925)
  Bottom Layer w10: v1(571,1925) 577.84,1918.16 U1.43
PB8_SCL: R6.1 U1.45 U2.23 | length 442.4
  Bottom Layer w10: U1.45 617.21,1933.21 705,2021 705,2101 ; U2.23 677.53,2128.47 705,2101 ; R6.1 748.96,2101 705,2101
PB9_SDA: R7.1 U1.46 U2.24 | length 558.2
  Top Layer w10: v1(671,2089) 671,1994 718,1947 v1(759,1947)
  Bottom Layer w10: U1.46 636.9,1921.9 727,2012 R7.1 v1@755.96,1950.04 ; U2.24 651.21,2108.79 v1(671,2089) ; v1@757.96,1948.04 v1(759,1947)
PB10: P2.3 U1.21 | length 1676.4
  Bottom Layer w10: P2.3 518.79,1015.57 U1.21
PB11: P2.4 U1.22 | length 1650.5
  Bottom Layer w10: P2.4 -269.11,265.89 499.1,1034.1 U1.22
PB12: P2.5 U1.25 | length 1675.3
  Bottom Layer w10: P2.5 -212.48,356.52 262,831 262,1453 363.73,1554.73 U1.25
PB13: P2.6 U1.26 | length 1689.3
  Bottom Layer w10: P2.6 -152.85,447.15 239,839 239,1463 350.42,1574.42 U1.26
PB14: P2.7 U1.27 | length 1699.9
  Bottom Layer w10: P2.7 -98.22,537.78 214,850 214,1470 338.1,1594.1 U1.27
PB15: P2.8 U1.28 | length 1709.8
  Bottom Layer w10: P2.8 -41.58,628.42 192,862 192,1477 328.79,1613.79 U1.28
PC13_DBGLED: D1.A U1.2 | length 326.9
  Top Layer w10: D1.A@984,1727.04 v1(984,1784)
  Bottom Layer w10: U1.2 874.58,1751.58 896,1773 973,1773 v1(984,1784)
PC14: P2.1 U1.3 | length 2408.9
  Top Layer w10: v1(625,1735) 574,1735 505,1666 505,1451 649,1307 v1(683,1307)
  Bottom Layer w10: P2.1 -218,-6 683,895 v1(683,1307) ; v1@625,1731.9 U1.3
PC15: P2.2 U1.4 | length 2287.3
  Top Layer w10: v1(587,1699) 528,1640 528,1489 v1(653,1364)
  Bottom Layer w10: P2.2 -169,84.63 653,906.63 v1(653,1364) ; v1(587,1699) 647,1699 660.21,1712.21 U1.4
VCC_3V3: C1.2 C2.2 C5.1 C6.2 C7.1 C8.1 C9.1 C10.1 C13.2 C14.1 C16.2 C18.1 D2.A P4.1 P5.1 P6.1 R1.2 R6.2 R7.2 U1.1 U1.24 U1.36 U1.48 U2.8 U2.13 U3.2 | length 7868.9
  Top Layer w10: P5.1 -221,1868 -164,1925 -164,1997 ; -163,1996 -164,1997 ; P4.1 -5,2460 -164,2301 -164,1997
  Top Layer w30: D2.A 979.96,1538.04 v2(1023,1495)
  Bottom Layer w10: v5(-159,2016) 273.08,2016 309.04,1980.04 ; P4.1 71,2419 C13.2 530.96,2335.54 514.79,2319.36 U2.13 ; C5.1 459.73,1429.69 U1.24 459.73,1680 ; C10.1 C5.1@415.04,1383 ; U2.8 425.51,2128.47 C16.2 375,2077.96 375,2046 309.04,1980.04 ; 676.27,1776 U1.48 ; R6.2 R7.2 826.04,1824.08 C6.2 773.23,1771.27 U1.1 589.27,1771.27 498,1680 459.73,1680 ; 309.04,1980.04 C9.1 311.04,1925 C8.1 368.77,1771.27 U1.36 449.32,1771.27 459.73,1760.86 459.73,1680
  Bottom Layer w30: R7.2 1313,2012 1441,1884 1441,1532 ; v2(1023,1495) R1.2 963.04,1395 C2.2 1054.96,1446.96 1140,1532 1441,1532 ; C18.1 1859.57,1113.43 1441,1532 ; U3.2@1861,667.89 1861,904.11 C18.1@1861,1034.57
  Bottom Layer w40: U3.2@1861,904.11 2004.89,904.11 2584,325 P6.1
VCC_5V: C20.2 D3.A D4.A DC5.0.1 U4.4 | length 1205
  Top Layer w40: D3.A 991.96,268.04 1015,245 1532.36,245 DC5.0.1
  Bottom Layer w40: C20.2 1499.64,392.6 U4.4 1561.88,215.48 DC5.0.1
VCC_BAT: C17.1 C19.2 P8.1 P9.1 U3.3 U4.3 | length 1389
  Top Layer w40: P9.1 924,767 975,818 1558,818 v4(1705,671) ; P8.1 1194,811
  Bottom Layer w30: C17.1@1770.45,570.98 U3.3 ; C19.2 1794.43,416.46 C17.1
  Bottom Layer w35: U4.3 1770.56,392.6 C19.2
  Bottom Layer w40: v4(1705,671) U3.3@1767.34,671
pads on no net: U2.0

## Polygon pours and split planes (outlines as drawn)
GND on Bottom Layer "Bottom Layer-No Net" (solid, remove dead copper, pour order 8): -1023,3153 -966,3096 -966,-270 -966,-284 -685,-565 -588,-662 416,-662 416,-311.75 962,848 1859,848 1861,553 1859,551 1860,552 1943,552 2316.72,-442.88 3624,649 3624,3200
GND_BAT on Bottom Layer "Bottom Layer-No Net" (solid, remove dead copper, pour order 6): 498,-688.86 498,-331.77 1005.16,767 1583,767 1583,449 1882.39,449 2215.69,-500.34 1135.04,-992.4
GND on Top Layer "Bottom Layer-No Net" (solid, remove dead copper, pour order 8): -1025.6,3150 -968.6,3093 -968.6,-273 -968.6,-287 -687.6,-568 -590.6,-665 413.4,-665 413.4,-314.75 959.4,845 1856.4,845 1858.4,550 1856.4,548 1857.4,549 1940.4,549 2314.12,-445.88 3621.4,646 3621.4,3197
GND_BAT on Top Layer "Bottom Layer-No Net" (solid, remove dead copper, pour order 6): 498,-688.86 498,-331.77 1005.16,767 1583,767 1583,449 1882.39,449 2215.69,-500.34 1135.04,-992.4

## Keep-outs
Keep-Out Layer:
  circle w10: c1107.4,1108.02 r1822.84
  circle w10: c1107.4,-163.63 r314.96
  circle w10: c1107.4,2379.68 r314.96
  circle w10: c-164.26,1108.02 r314.96
  circle w10: c2379.05,1108.02 r314.96

## Silkscreen, mask and mechanical layers (free items; w line width, h text height)
Top Overlay:
  text "A7" at 1306,2721 h36
  text "ASDA" at 883,2720 h36
  text "ASCL" at 723,2690 h36
  text "A6" at 1399,2688 h36
  text "AD0" at 578,2664 h36
  text "A5" at 1492,2656 h36
  text "A4" at 1589,2619 h36
  text "A3" at 1680,2584 h36
  text "GND" at 337,2566 h36
  text "A2" at 1770,2548 h36
  text "A1" at 1875,2516 h36
  text "SWCLK" at 246,2507 h36
  text "A0" at 1954,2484 h36
  text "SWDIO" at 158,2444 h36
  text "3V3" at 63,2378 h36
  text "RollingBall" at 173,2221 h60
  text "May.07,2017" at 173,2100 h60
  text "GND" at -204,2092 h36
  text "A10_RX" at -255,2009 h36
  text "Designed by DoubleHan" at 173,1982 h60
  text "A9_TX" at -313,1903 h36
  text "3V3" at -364,1818 h36
  text "B7" at -519,1509 h36
  text "B6" at -521,1409 h36
  text "B5" at -522,1308 h36
  text "B4" at -698,1206 h36
  text "B3" at -702,1104 h36
  text "B2" at -702,1000 h36
  text "B1" at -512,900 h36
  text "B0" at -516,795 h36
  text "B15" at -456,641 h36
  text "+" at 898,619 h60
  text "-" at 1014,619 h60
  text "+" at 1166,619 h60
  text "-" at 1285,619 h60
  text "B14" at -422,545 h36
  text "B13" at -377,450 h36
  text "3V3" at 2457,357 h36
  text "B12" at -335,346 h36
  text "B11" at -293,262 h36
  text "GND" at 2401,248 h36
  text "B10" at -249,175 h36
  text "C15" at -210,89 h36
  text "C14" at -218,-103 h36
  text "CHARG" at 315,-134 h36
  text "PWR_ON" at 564,-279 h36
Bottom Overlay:
  text "1" at 679,2041 h36
  text "6" at 474,2039 h36
  text "1" at 789,1753 h36
  text "2" at 797,1696 h36
Drill Drawing:
  text ".Legend" at 301,4206 h60